# EAGLE board BT_atmega_v_1_1 (EAGLE 6.5.0)
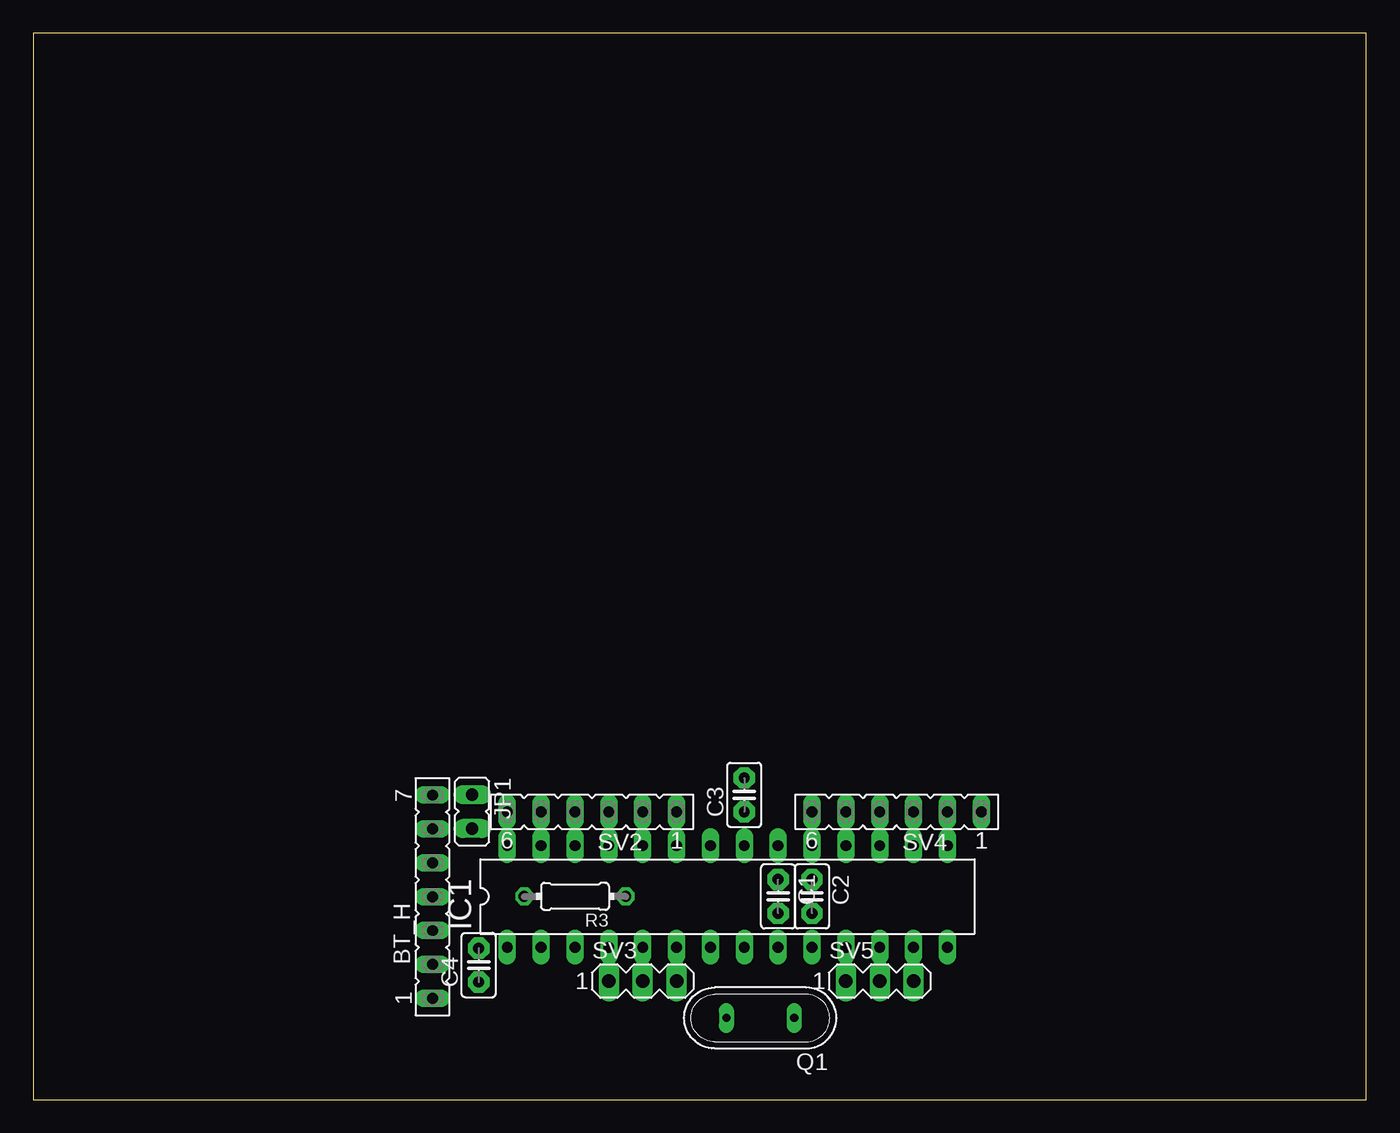
[diagram p0: board, top side]
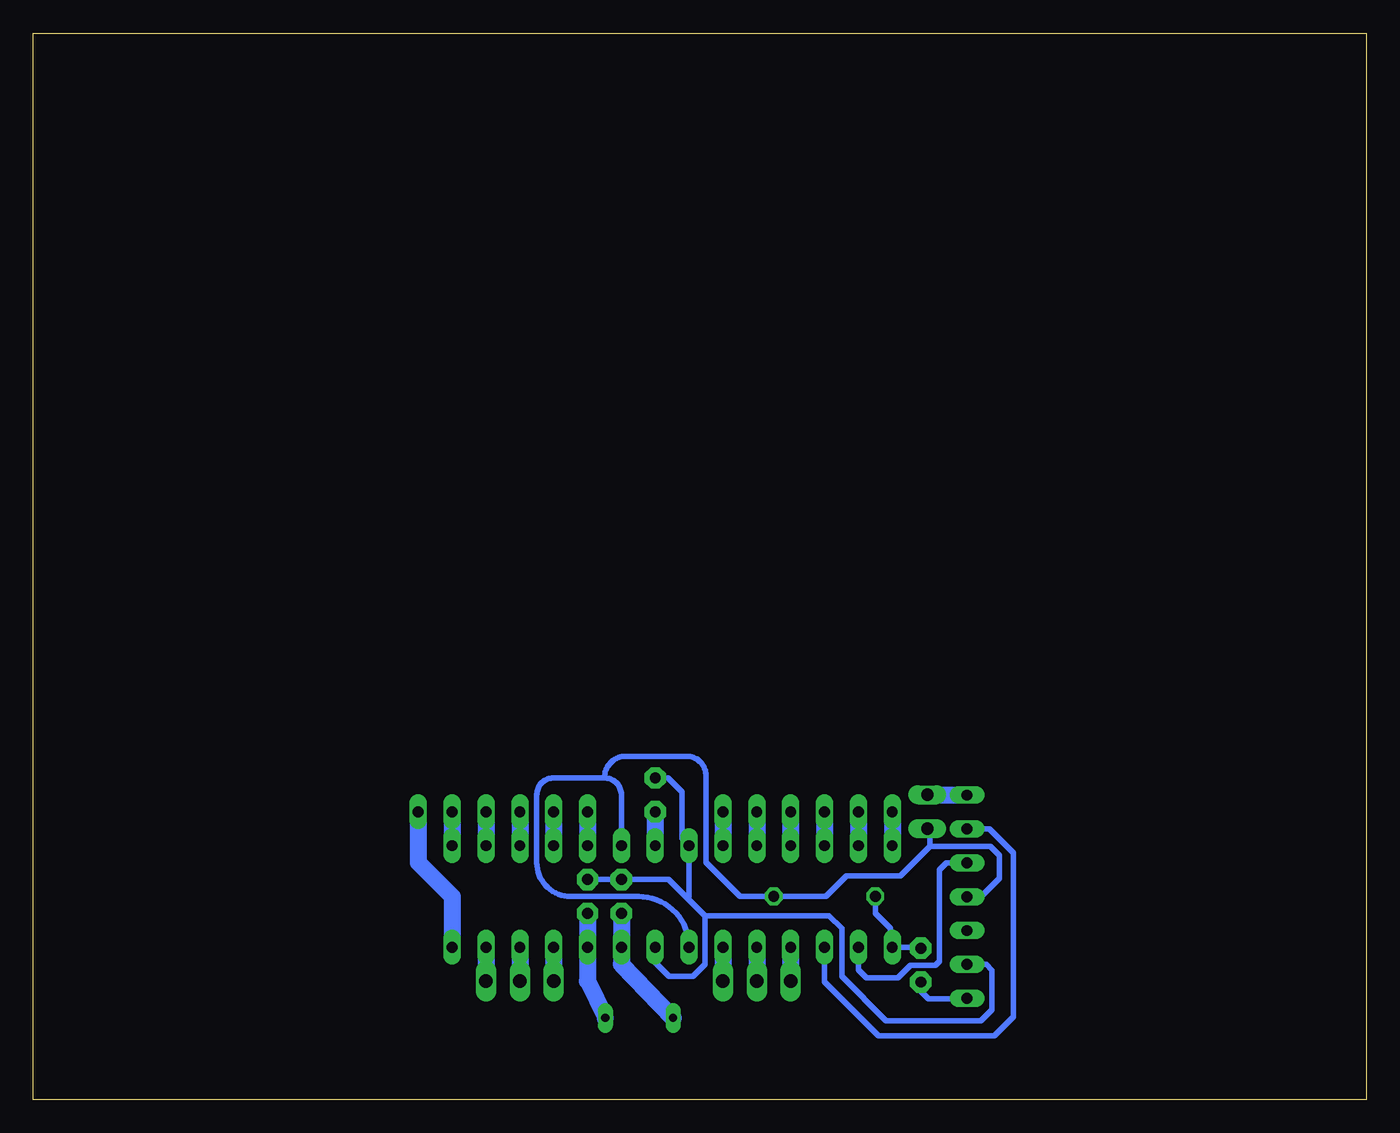
[diagram p1: board, bottom side, seen from below]

Size 100 x 80 mm. Coordinates in mm from the lower left corner, seen from the top.
Outline: 0,0 100,0 100,80 0,80 0,0
Copper layers (1*16): Top 0.035mm / dielectric 1.5mm / Bottom 0.035mm
Design rules "default": minimum track width 10mil, minimum drill 24mil, track to track 8mil, track to pad 8mil, pad to pad 8mil, via to via 8mil, smd to smd 8mil, copper to edge 40mil, drill to drill 8mil, minimum pad ring 10mil, minimum via ring 8mil, stop-mask expansion 4mil, vias tented up to drill 0mil, thermal gap 10mil

## Footprints (pad centres in the part's own frame; a part is rotated, then mirrored left to right if it is on the bottom)
FE07 = drill 0.813 long: 1 -7.62,0; 2 -5.08,0; 3 -2.54,0; 4 0,0; 5 2.54,0; 6 5.08,0; 7 7.62,0
C2.5-2 = drill 0.813 pad 1.6 octagon: 1 -1.27,0; 2 1.27,0
DIL28-3 = drill 0.813 long: 1 -16.51,-3.81; 2 -13.97,-3.81; 3 -11.43,-3.81; 4 -8.89,-3.81; 5 -6.35,-3.81; 6 -3.81,-3.81; 7 -1.27,-3.81; 8 1.27,-3.81; 9 3.81,-3.81; 10 6.35,-3.81; 11 8.89,-3.81; 12 11.43,-3.81; 13 13.97,-3.81; 14 16.51,-3.81; 15 16.51,3.81; 16 13.97,3.81; 17 11.43,3.81; 18 8.89,3.81; 19 6.35,3.81; 20 3.81,3.81; 21 1.27,3.81; 22 -1.27,3.81; 23 -3.81,3.81; 24 -6.35,3.81; 25 -8.89,3.81; 26 -11.43,3.81; 27 -13.97,3.81; 28 -16.51,3.81
JP1 = drill 0.914 long: 1 0,-1.27; 2 0,1.27
QS = drill 0.61 long: 1 -2.54,0; 2 2.54,0
0204/7 = drill 0.813 octagon: 1 -3.81,0; 2 3.81,0
FE06 = drill 0.813 long: 1 -6.35,0; 2 -3.81,0; 3 -1.27,0; 4 1.27,0; 5 3.81,0; 6 6.35,0
MA03-1 = drill 1.016 long: 1 -2.54,0; 2 0,0; 3 2.54,0

## Placement (x,y rotation side)
BT_H  H1  [FE07]  29.95,15.22 90 top
C1  100nf  [C2.5-2]  55.88,15.24 270 top
C2  100nf  [C2.5-2]  58.42,15.24 270 top
C3  100nf  [C2.5-2]  53.34,22.86 90 top
C4  100nf  [C2.5-2]  33.42,10.09 90 top
IC1  MEGA8-P  [DIL28-3]  52.07,15.24 0 top
JP1  BT_KEY  [JP1]  32.93,21.6 180 top
Q1  16Mhz  [QS]  54.54,6.12 180 top
R3  1K  [0204/7]  40.64,15.24 180 top
SV2  H2  [FE06]  41.91,21.59 180 top
SV3  H3  [MA03-1]  45.72,8.89 0 top
SV4  H4  [FE06]  64.77,21.59 180 top
SV5  H5  [MA03-1]  63.5,8.89 0 top

## Library data of the parts
BT_H SV2 SV4 = con-lsta; OC_FARNELL: unknown; OC_NEWARK: unknown
C1-C4 = capacitor-wima
IC1 = atmel; OC_FARNELL: unknown; OC_NEWARK: unknown
JP1 = jumper
Q1 = special
R3 = eagle-ltspice; SPICEMODEL: NONE; SPICEPREFIX: R
SV3 SV5 = con-lstb; OC_FARNELL: unknown; OC_NEWARK: unknown

## Nets
GND: BT_H.2 C1.1 C2.1 C3.2 IC1.8 IC1.22
N$1: C1.2 IC1.9 Q1.2
N$2: C2.2 IC1.10 Q1.1
N$3: C4.2 IC1.1 R3.2
N$4: C3.1 IC1.21
N$5: BT_H.5 IC1.2
N$6: BT_H.6 IC1.3
N$7: BT_H.7 JP1.1
N$8: IC1.23 SV2.1
N$9: IC1.24 SV2.2
N$10: IC1.25 SV2.3
N$11: IC1.26 SV2.4
N$12: IC1.27 SV2.5
N$13: IC1.28 SV2.6
N$14: IC1.4 SV3.1
N$15: IC1.5 SV3.2
N$16: IC1.6 SV3.3
N$17: IC1.11 SV5.1
N$18: IC1.12 SV5.2
N$19: IC1.13 SV5.3
N$20: IC1.14 SV4.1
N$21: IC1.15 SV4.2
N$22: IC1.16 SV4.3
N$23: IC1.17 SV4.4
N$24: IC1.18 SV4.5
N$25: IC1.19 SV4.6
N$26: BT_H.1 C4.1
VCC: BT_H.4 IC1.7 IC1.20 JP1.2 R3.1

## Tracks (layer width: path | path; a pad name or v marks a point on that pad's centre or on a via)
GND
  Bottom 0.406: C2.1 C1.1 55.86,16.53 52.35,16.53 50.93,15.11 | C3.2 52.37,24.13 51.33,23.09 51.33,19.58 IC1.22 50.8,15.24 50.93,15.11 | IC1.8 53.34,10.31 52.29,9.26 50.5,9.26 49.62,10.15 49.62,13.8 | 49.62,13.8 49.93,14.11 50.93,15.11 | BT_H.2 28.5,10.14 28.07,9.7 28.07,6.73 28.9,5.9 36.02,5.9 39.35,9.23 39.35,12.84 40.3,13.79 49.61,13.79 49.62,13.8
N$1
  Bottom 1.27: Q1.2 55.88,10.16 IC1.9 C1.2
N$2
  Bottom 1.27: Q1.1 58.42,8.89 IC1.10 C2.2
N$3
  Bottom 0.406: R3.2 36.83,13.98 35.71,12.86 35.71,11.58 IC1.1 33.49,11.43 C4.2
N$4
  Bottom 1.27: C3.1 IC1.21
N$5
  Bottom 0.406: BT_H.5 31.5,17.76 31.6,17.65 | 31.6,17.65 | 31.6,17.65 32.02,17.23 32.02,10.39 32.33,10.08 34.19,10.08 35.14,9.13 37.5,9.13 38.1,9.74 IC1.2
N$6
  Bottom 0.406: 40.64,10.16 IC1.3 40.64,8.84 36.58,4.78 27.91,4.78 26.47,6.22 26.47,18.49 28.28,20.3 BT_H.6
N$7
  Bottom 1.27: JP1.1 29.98,22.87 BT_H.7
N$8
  Bottom 1.27: SV2.1 IC1.23
N$9
  Bottom 1.27: SV2.2 IC1.24
N$10
  Bottom 1.27: SV2.3 IC1.25
N$11
  Bottom 1.27: SV2.4 IC1.26
N$12
  Bottom 1.27: SV2.5 IC1.27
N$13
  Bottom 1.27: SV2.6 IC1.28
N$14
  Bottom 1.27: IC1.4 SV3.1
N$15
  Bottom 1.27: IC1.5 SV3.2
N$16
  Bottom 1.27: IC1.6 SV3.3
N$17
  Bottom 1.27: IC1.11 SV5.1
N$18
  Bottom 1.27: IC1.12 SV5.2
N$19
  Bottom 1.27: IC1.13 SV5.3
N$20
  Bottom 1.27: SV4.1 71.12,17.78 68.58,15.24 IC1.14
N$21
  Bottom 1.27: SV4.2 IC1.15
N$22
  Bottom 1.27: SV4.3 IC1.16
N$23
  Bottom 1.27: SV4.4 IC1.17
N$24
  Bottom 1.27: SV4.5 IC1.18
N$25
  Bottom 1.27: SV4.6 IC1.19
N$26
  Bottom 0.406: C4.1 33.42,8.13 32.86,7.57 29.98,7.57 BT_H.1
VCC
  Bottom 0.406: IC1.20 55.88,22.86 arc-90 57.15,24.13 | 57.15,24.13 arc90 55.52,25.76 51,25.76 arc90 49.53,24.29 49.53,17.78 46.99,15.24 R3.1 40.52,15.24 38.98,16.78 34.95,16.78 32.74,18.98 | 57.15,24.13 60.96,24.13 arc-90 62.23,22.86 62.23,17.78 arc-90 59.69,15.24 54.61,15.24 arc90 IC1.7 | 32.74,18.98 28.18,18.98 27.53,18.34 27.53,16.59 28.83,15.29 29.87,15.29 BT_H.4 | 32.74,18.98 32.74,20.14 JP1.2